# EAGLE board 150309_AriloRX_REV3_0_0 (EAGLE 6.5.0), part 1 of 2
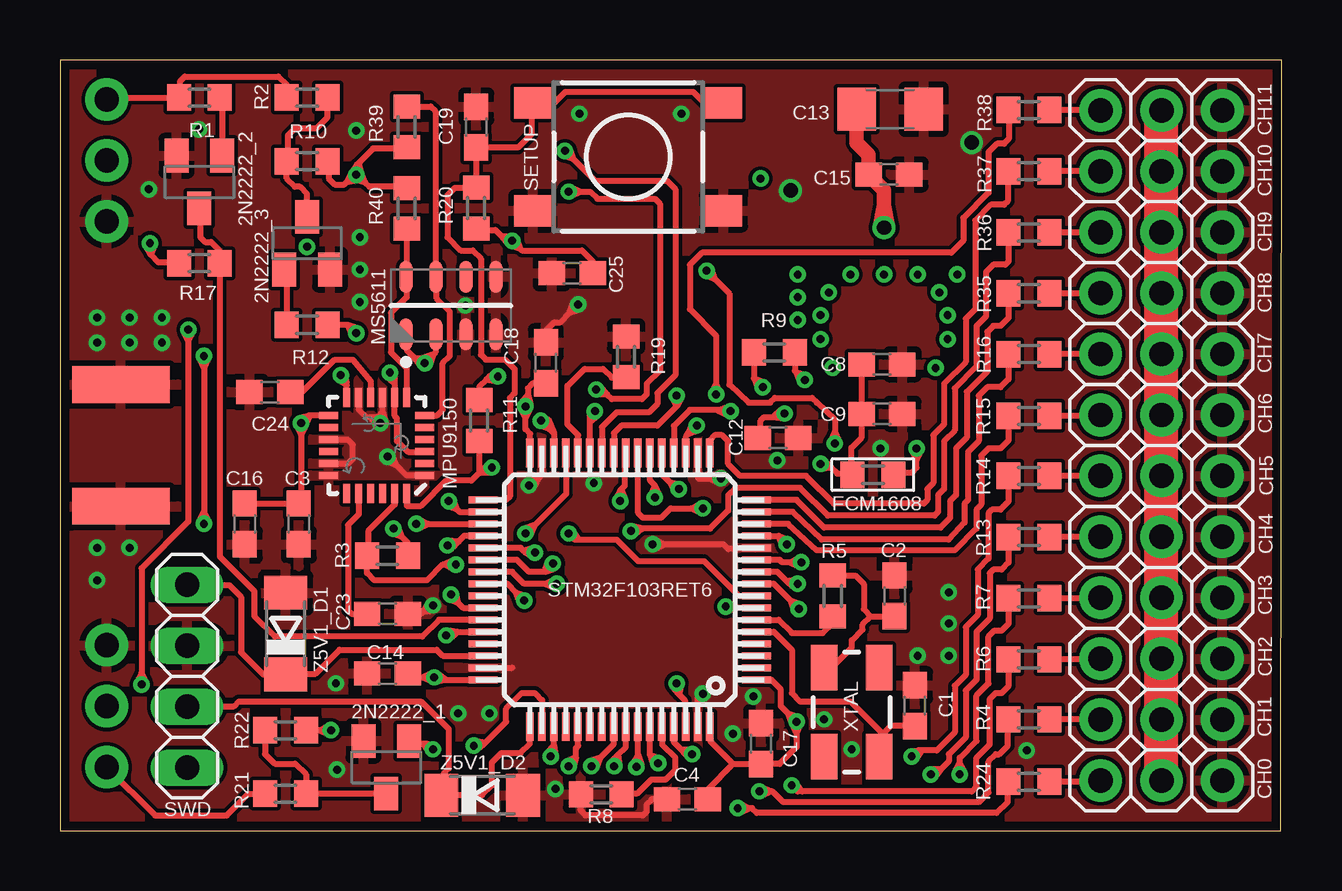
[diagram p0: board, top side]
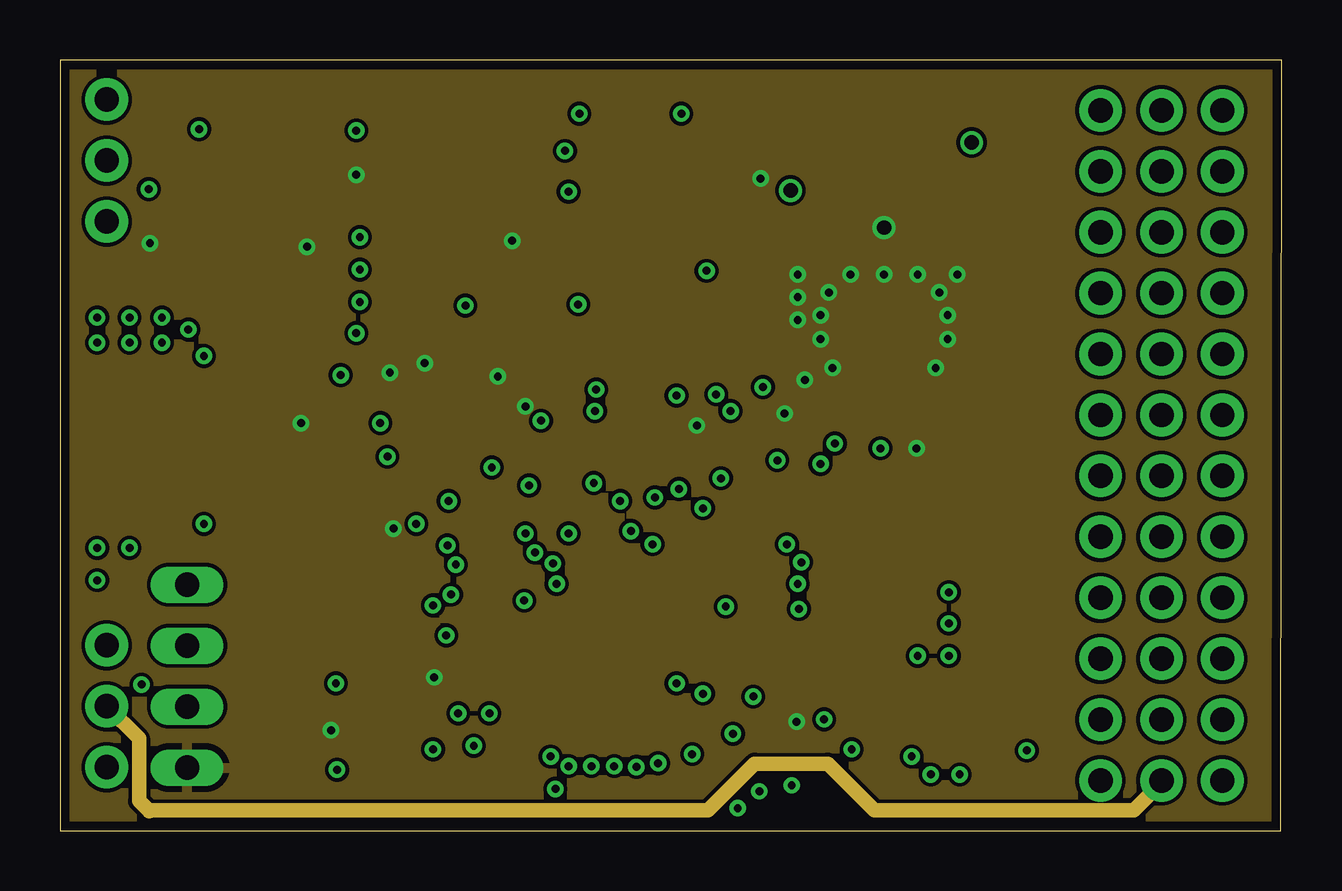
[diagram p1: board, inner layer Route2]
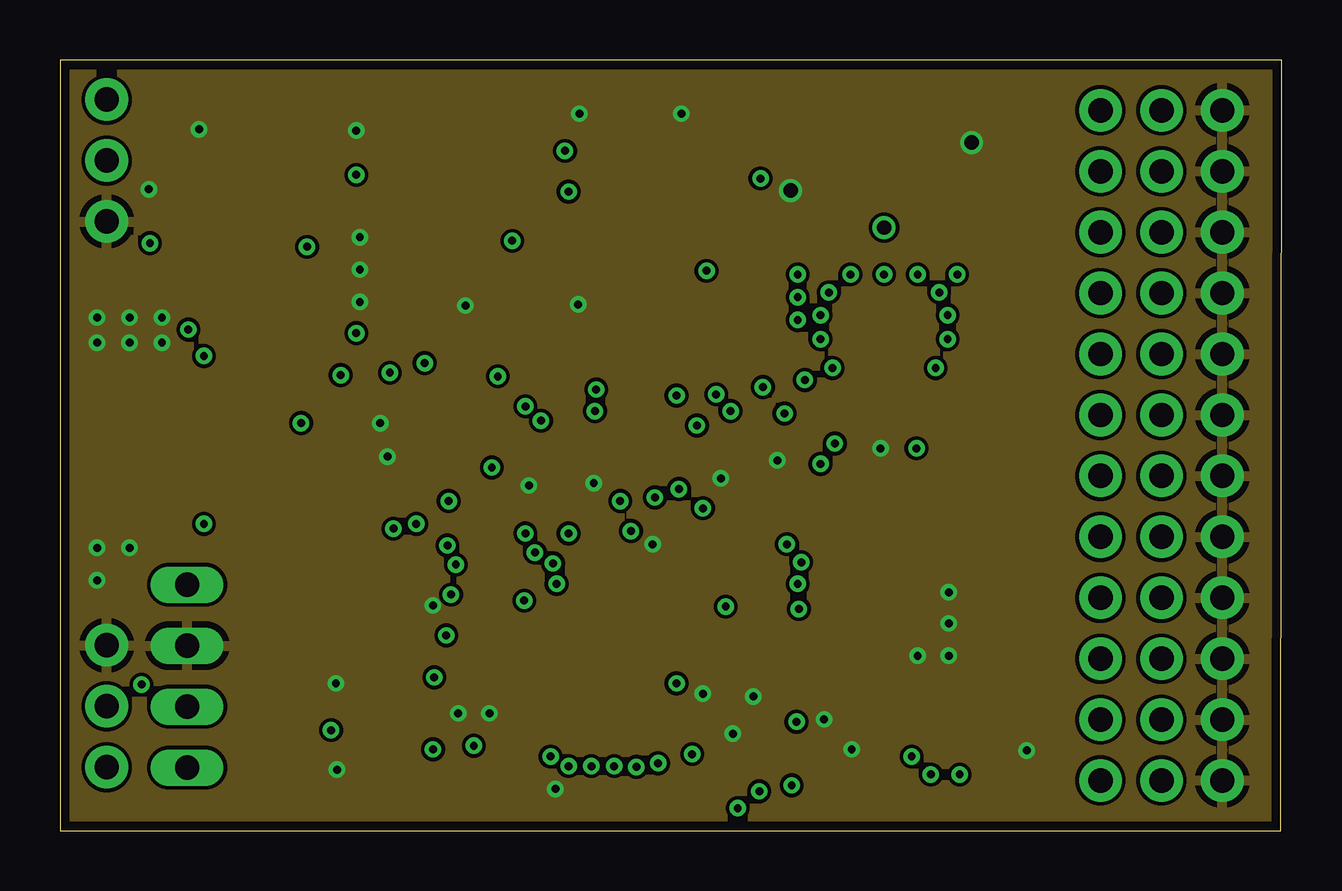
[diagram p2: board, inner layer Route15]
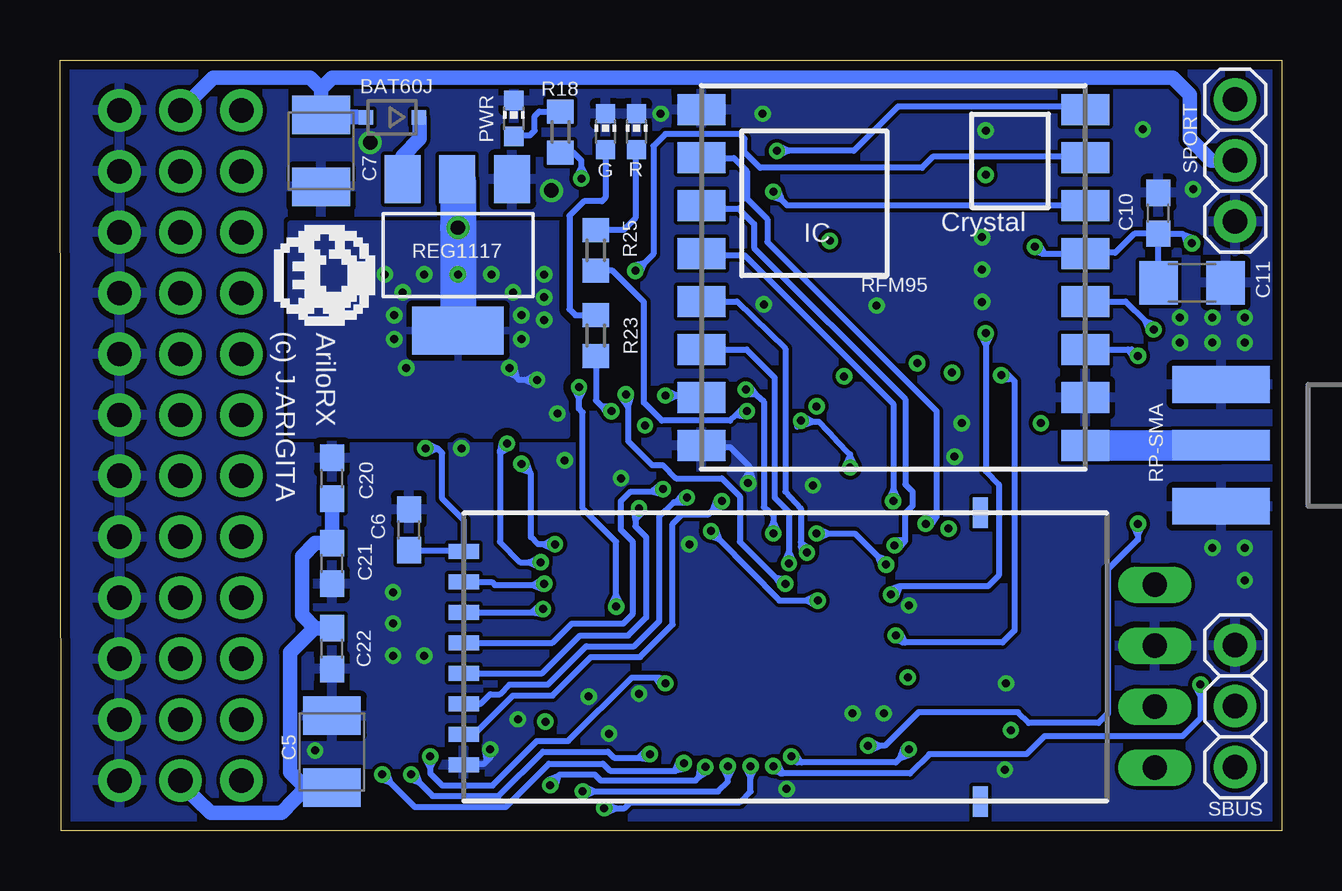
[diagram p3: board, bottom side, seen from below]

Size 50.94 x 32.14 mm. Coordinates in mm from the lower left corner, seen from the top.
Outline: 0,0 50.88,0 50.94,32.14 0,32.14 0,0
Copper layers (1*2*15*16): Top 0.0356mm / dielectric 0.17018125mm / Route2 0.0178mm / dielectric 47mil / Route15 0.0178mm / dielectric 0.17018125mm / Bottom 0.0356mm
Design rules "LaenPCBOrder *": minimum track width 6mil, minimum drill 13mil, track to track 6mil, track to pad 6mil, pad to pad 6mil, via to via 6mil, smd to smd 6mil, copper to edge 15mil, drill to drill 6mil, minimum pad ring 7mil, minimum via ring 7mil, stop-mask expansion 4mil, vias tented up to drill 0mil, thermal gap 10mil

## Footprints (pad centres in the part's own frame; a part is rotated, then mirrored left to right if it is on the bottom)
SOT23-BEC = smd 1 x 1.4: B -0.95,-1.1; C 0,1.1; E 0.95,-1.1
SOD323-R = smd 0.6 x 0.6: A 1.1,0; C -1.1,0
RESISTOR_C0603 = smd 1.1 x 1: 1 -0.85,0; 2 0.85,0
SMC_B = smd 1.6 x 2.4: + -1.5,0; - 1.5,0
RESISTOR_C3216 = smd 1.6 x 1.8: 1 -1.4,0; 2 1.4,0
1X03 = drill 1.016 pad 1.778: 1 -2.54,0; 2 0,0; 3 2.54,0
R0603 = smd 1 x 1.1: 1 -0.85,0; 2 0.85,0
CHIP-LED0603 = smd 0.8 x 0.8: A 0,-0.75; C 0,0.75
QFN-24-NP = smd 0.8 x 0.3: 1 -2,1.25; 2 -2,0.75; 3 -2,0.25; 4 -2,-0.25; 5 -2,-0.75; 6 -2,-1.25; 13 2,-1.25; 14 2,-0.75; 15 2,-0.25; 16 2,0.25; 17 2,0.75; 18 2,1.25 | smd 0.3 x 0.8: 7 -1.25,-2; 8 -0.75,-2; 9 -0.25,-2; 10 0.25,-2; 11 0.75,-2; 12 1.25,-2; 19 1.25,2; 20 0.75,2; 21 0.25,2; 22 -0.25,2; 23 -0.75,2; 24 -1.25,2
SON125P300X500X100-8N = smd 1.35 x 0.55: 1 -1.2,1.875; 2 -1.2,0.625; 3 -1.2,-0.625; 4 -1.2,-1.875; 5 1.2,-1.875; 6 1.2,-0.625; 7 1.2,0.625; 8 1.2,1.875
NRF24L01+_NRF24L01_SMD = smd 1.27 x 0.635: P$1 26.807,10.492; P$2 26.807,9.222; P$3 26.807,7.952; P$4 26.807,6.682; P$5 26.807,5.412; P$6 26.807,4.142; P$7 26.807,2.872; P$8 26.807,1.602 | smd 0.635 x 1.27: P$11 5.267,-0.018; P$13 5.267,12.032
LED_CHIP-LED0603 = smd 0.8 x 0.8: A 0,-0.75; C 0,0.75
RCL_R0603 = smd 1 x 1.1: 1 -0.85,0; 2 0.85,0
SOT223 = smd 1.499 x 2.007: 1 -2.261,-3.15; 2 0.025,-3.15; 3 2.311,-3.15 | smd 3.81 x 2.007: 4 0,3.15
RFM95W_MISIEK_RFM95W_SMD = smd 2 x 1.3: 1 -8,7; 2 -8,5; 3 -8,3; 4 -8,1; 5 -8,-1; 6 -8,-3; 7 -8,-5; 8 -8,-7; 9 8,-7; 10 8,-5; 11 8,-3; 12 8,-1; 13 8,1; 14 8,3; 15 8,5; 16 8,7
SMA_EDGELAUNCH = smd 4.064 x 1.524: GND@1 2.032,-2.54; GND@2 2.032,2.54 | smd 4.064 x 1.524 bottom: GND@3 2.032,2.54; GND@4 2.032,-2.54 | smd 4.064 x 1.27: P 2.032,0
DTSM-6 = smd 1.55 x 1.3: 1 -3.975,2.25; 2 3.975,2.25; 3 -3.975,-2.25; 4 3.975,-2.25
TQFP64 = smd 1.2 x 0.3: 1 -5.7,3.75; 2 -5.7,3.25; 3 -5.7,2.75; 4 -5.7,2.25; 5 -5.7,1.75; 6 -5.7,1.25; 7 -5.7,0.75; 8 -5.7,0.25; 9 -5.7,-0.25; 10 -5.7,-0.75; 11 -5.7,-1.25; 12 -5.7,-1.75; 13 -5.7,-2.25; 14 -5.7,-2.75; 15 -5.7,-3.25; 16 -5.7,-3.75; 33 5.7,-3.75; 34 5.7,-3.25; 35 5.7,-2.75; 36 5.7,-2.25; 37 5.7,-1.75; 38 5.7,-1.25; 39 5.7,-0.75; 40 5.7,-0.25; 41 5.7,0.25; 42 5.7,0.75; 43 5.7,1.25; 44 5.7,1.75; 45 5.7,2.25; 46 5.7,2.75; 47 5.7,3.25; 48 5.7,3.75 | smd 0.3 x 1.2: 17 -3.75,-5.7; 18 -3.25,-5.7; 19 -2.75,-5.7; 20 -2.25,-5.7; 21 -1.75,-5.7; 22 -1.25,-5.7; 23 -0.75,-5.7; 24 -0.25,-5.7; 25 0.25,-5.7; 26 0.75,-5.7; 27 1.25,-5.7; 28 1.75,-5.7; 29 2.25,-5.7; 30 2.75,-5.7; 31 3.25,-5.7; 32 3.75,-5.7; 49 3.75,5.7; 50 3.25,5.7; 51 2.75,5.7; 52 2.25,5.7; 53 1.75,5.7; 54 1.25,5.7; 55 0.75,5.7; 56 0.25,5.7; 57 -0.25,5.7; 58 -0.75,5.7; 59 -1.25,5.7; 60 -1.75,5.7; 61 -2.25,5.7; 62 -2.75,5.7; 63 -3.25,5.7; 64 -3.75,5.7
1X04 = drill 1.016 long: 1 -3.81,0; 2 -1.27,0; 3 1.27,0; 4 3.81,0
CRYSTAL-SMD-5X3 = smd 1.9 x 1.1: 1 -1.85,-1.15; 2 1.85,-1.15; 3 1.85,1.15; 4 -1.85,1.15
SOD80C = smd 1.4 x 1.8: A 1.7,0; C -1.7,0

## Placement (x,y rotation side)
2N2222_1  [SOT23-BEC]  13.6,2.65 180 top
2N2222_2  [SOT23-BEC]  5.81,27.05 180 top
2N2222_3  [SOT23-BEC]  10.3,24.5 0 top
BAT60J  [SOD323-R]  37.09,29.75 180 bottom
C1  12pF  [RESISTOR_C0603]  35.64,5.22 90 top
C2  12pF  [RESISTOR_C0603]  34.79,9.8 90 top
C3  100nF  [RESISTOR_C0603]  9.95,12.8 270 top
C4  100nF  [RESISTOR_C0603]  26.15,1.32 0 top
C5  [SMC_B]  39.6,3.3 90 bottom
C6  100nF  [RESISTOR_C0603]  36.38,12.55 90 bottom
C7  100uF  [SMC_B]  40.05,28.35 270 bottom
C8  100nF  [RESISTOR_C0603]  34.26,19.45 0 top
C9  1uF  [RESISTOR_C0603]  34.26,17.39 0 top
C10  100nF  [RESISTOR_C0603]  5.15,25.75 90 bottom
C11  10uF  [RESISTOR_C3216]  3.75,22.85 0 bottom
C12  100nF  [RESISTOR_C0603]  29.93,16.39 0 top
C13  10uF  [RESISTOR_C3216]  34.6,30.09 0 top
C14  100nF  [RESISTOR_C0603]  13.65,6.56 180 top
C15  100nF  [RESISTOR_C0603]  34.55,27.36 0 top
C16  10nF  [RESISTOR_C0603]  7.7,12.8 270 top
C17  100nF  [RESISTOR_C0603]  29.23,3.64 90 top
C18  100nF  [RESISTOR_C0603]  20.25,19.52 90 top
C19  100nF  [RESISTOR_C0603]  17.35,29.34 270 top
C20  100nF  [RESISTOR_C0603]  39.6,14.7 90 bottom
C21  10nF  [RESISTOR_C0603]  39.6,11.15 270 bottom
C22  1nF  [RESISTOR_C0603]  39.6,7.6 270 bottom
C23  2.2nF  [RESISTOR_C0603]  13.65,9.05 0 top
C24  100nF  [RESISTOR_C0603]  8.75,18.3 180 top
C25  100nF  [RESISTOR_C0603]  21.35,23.25 180 top
CH0  [1X03]  45.91,2.1 180 top
CH1  [1X03]  45.91,4.64 180 top
CH2  [1X03]  45.91,7.18 180 top
CH3  [1X03]  45.91,9.72 180 top
CH4  [1X03]  45.91,12.26 180 top
CH5  [1X03]  45.91,14.8 180 top
CH6  [1X03]  45.91,17.34 180 top
CH7  [1X03]  45.91,19.88 180 top
CH8  [1X03]  45.91,22.42 180 top
CH9  [1X03]  45.91,24.96 180 top
CH10  [1X03]  45.91,27.5 180 top
CH11  [1X03]  45.91,30.04 180 top
FCM1608  [R0603]  33.88,14.85 180 top
G  [CHIP-LED0603]  28.2,29.15 0 bottom
MPU9150  [QFN-24-NP]  13.2,16.07 180 top
MS5611  MS5611-01BA03  [SON125P300X500X100-8N]  16.3,21.9 90 top
NRF24L01_SMD  NRF24L01+_NRF24L01_SMDSMD  [NRF24L01+_NRF24L01_SMD]  7.3,13.25 180 bottom
PWR  [LED_CHIP-LED0603]  32.02,29.7 0 bottom
R  [CHIP-LED0603]  26.9,29.15 0 bottom
R1  10K  [RCL_R0603]  5.81,30.57 0 top
R2  1K  [RCL_R0603]  10.3,30.57 0 top
R3  4.7K  [RCL_R0603]  13.65,11.47 180 top
R4  1K  [RCL_R0603]  40.38,4.65 180 top
R5  80R  [RCL_R0603]  32.21,9.8 90 top
R6  1K  [RCL_R0603]  40.38,7.15 180 top
R7  1K  [RCL_R0603]  40.38,9.7 180 top
R8  510R  [RCL_R0603]  22.56,1.52 180 top
R9  10K  [RCL_R0603]  29.77,19.95 180 top
R10  1K  [RCL_R0603]  10.3,27.91 180 top
R11  4.7K  [RCL_R0603]  17.48,17.11 90 top
R12  1K  [RCL_R0603]  10.3,21.1 0 top
R13  1K  [RCL_R0603]  40.38,12.25 180 top
R14  1K  [RCL_R0603]  40.38,14.8 180 top
R15  1K  [RCL_R0603]  40.38,17.3 180 top
R16  1K  [RCL_R0603]  40.38,19.88 180 top
R17  4.7K  [RCL_R0603]  5.81,23.66 0 top
R18  10K  [RCL_R0603]  30.07,29.14 90 bottom
R19  510R  [RCL_R0603]  23.6,19.77 90 top
R20  10K  [RCL_R0603]  17.35,25.96 270 top
R21  1K  [RCL_R0603]  9.4,1.55 0 top
R22  1K  [RCL_R0603]  9.4,4.2 180 top
R23  220  [RCL_R0603]  28.6,20.65 270 bottom
R24  1K  [RCL_R0603]  40.38,2.05 180 top
R25  220  [RCL_R0603]  28.6,24.2 270 bottom
R35  1K  [RCL_R0603]  40.38,22.41 180 top
R36  1K  [RCL_R0603]  40.38,24.95 180 top
R37  1K  [RCL_R0603]  40.38,27.5 180 top
R38  1K  [RCL_R0603]  40.38,30.05 180 top
R39  4.7K  [RCL_R0603]  14.45,29.35 90 top
R40  4.7K  [RCL_R0603]  14.45,25.95 90 top
REG1117  REG1117  [SOT223]  34.35,24.02 180 bottom
RFM95  RFM95W_MISIEK_RFM95WSMD  [RFM95W_MISIEK_RFM95W_SMD]  16.2,23.07 0 bottom
RP-SMA  [SMA_EDGELAUNCH]  0.5,16.07 180 bottom
SBUS  [1X03]  1.95,5.2 90 bottom
SETUP  DTSM-6  [DTSM-6]  23.68,28.1 180 top
SPORT  [1X03]  1.95,27.95 270 bottom
STM32F103RET6  STM32F103RET6  [TQFP64]  23.34,10.05 180 top
SWD  [1X04]  5.3,6.45 90 top
XTAL  12MHz  [CRYSTAL-SMD-5X3]  33,4.95 270 top
Z5V1_D1  Z5V1  [SOD80C]  9.41,8.22 90 top
Z5V1_D2  Z5V1  [SOD80C]  17.6,1.49 0 top

## Library data of the parts
2N2222_1-2N2222_3 = transistor
BAT60J Z5V1_D1 Z5V1_D2 = diode
C1-C4 C6 C8-C25 PWR R1-R25 R35-R40 RFM95 = AriloTX
C5 C7 = rcl
CH0 CH1-CH11 SBUS SPORT = pinhead_rc
FCM1608 = BaseApp
G R = led
MPU9150 = SparkFun-Sensors
MS5611 = Measurement-Specialties
NRF24L01_SMD = Arilo_TX140810_AriloTX_REV3_0_0_868MHZ_td
REG1117 = CEDT
RP-SMA = adafruit
SETUP = switch-tact
STM32F103RET6 = stm32
SWD = pinhead
XTAL = SparkFun-FreqCtrl

## Nets
BOOT1: R19.1 STM32F103RET6.28
CH0: R24.2 STM32F103RET6.56
CH1: R4.2 STM32F103RET6.57
CH2: R6.2 STM32F103RET6.58
CH3: R7.2 STM32F103RET6.59
CH4: R13.2 STM32F103RET6.61
CH5: R14.2 STM32F103RET6.62
CH6: R15.2 STM32F103RET6.14
CH7: R16.2 STM32F103RET6.15
CH8: R35.2 STM32F103RET6.16
CH9: R36.2 STM32F103RET6.40
CH10: R37.2 STM32F103RET6.17
CH11: R38.2 STM32F103RET6.39
GND: 2N2222_1.E 2N2222_2.E 2N2222_3.E C1.2 C2.2 C3.2 C4.1 C5.- C6.2 C7.- C8.2 C9.2 C10.2 C11.2 C12.2 C13.2 C14.2 C15.2 C16.2 C17.2 C18.2 C19.1 C20.2 C21.2 C22.2 C23.2 C24.2 C25.2 CH0.1 CH1.1 CH2.1 CH3.1 CH4.1 CH5.1 CH6.1 CH7.1 CH8.1 CH9.1 CH10.1 CH11.1 G.C MPU9150.1 MPU9150.9 MPU9150.11 MPU9150.15 MPU9150.17 MPU9150.18 MS5611.3 MS5611.4 MS5611.5 NRF24L01_SMD.P$1 PWR.C R8.2 R19.2 R.C REG1117.1 RFM95.1 RFM95.8 RFM95.10 RP-SMA.GND@1 RP-SMA.GND@2 RP-SMA.GND@3 RP-SMA.GND@4 SBUS.3 SETUP.1 SETUP.2 SPORT.3 STM32F103RET6.12 STM32F103RET6.18 STM32F103RET6.31 STM32F103RET6.47 STM32F103RET6.63 SWD.3 Z5V1_D1.A Z5V1_D2.A
HOPERF_CSN: RFM95.5 STM32F103RET6.37
HOPERF_DIO0: RFM95.14 STM32F103RET6.8
HOPERF_DIO1: RFM95.15 STM32F103RET6.11
HOPERF_DIO2: RFM95.16 STM32F103RET6.26
HOPERF_DIO3: RFM95.11 STM32F103RET6.50
HOPERF_DIO4: RFM95.12 STM32F103RET6.53
HOPERF_DIO5: RFM95.7 STM32F103RET6.25
HOPERF_RESET: RFM95.6 STM32F103RET6.38
I2C2_SCL: MPU9150.23 R3.2 STM32F103RET6.29
I2C2_SDA: MPU9150.24 R11.1 STM32F103RET6.30
INP_1: C19.2 R20.1 SETUP.3 SETUP.4 STM32F103RET6.33
LED_GREEN: R23.2 STM32F103RET6.20
LED_RED: R25.2 STM32F103RET6.27
MPU_INT: MPU9150.12 STM32F103RET6.44
N$1: C1.1 STM32F103RET6.5 XTAL.3
N$2: R5.1 STM32F103RET6.6
N$3: C2.1 R5.2 XTAL.1
N$4: R8.1 STM32F103RET6.60
N$5: 2N2222_3.C R2.2 R10.2
N$7: RFM95.9 RP-SMA.P
N$8: 2N2222_3.B R12.1
N$9: CH0.3 R24.1
N$10: PWR.A R18.2
N$11: 2N2222_1.C R21.2 R22.2
N$12: G.A R23.1
N$13: CH8.3 R35.1
N$14: R1.1 R2.1 SPORT.1
N$15: R25.1 R.A
N$16: 2N2222_2.B R1.2
N$17: C8.1 C9.1 FCM1608.2 STM32F103RET6.13
N$19: STM32F103RET6.45
N$20: STM32F103RET6.2
N$21: CH2.3 R6.1
N$22: STM32F103RET6.3
N$23: CH4.3 R13.1
N$24: STM32F103RET6.4
N$25: CH9.3 R36.1
N$26: CH10.3 R37.1
N$27: CH11.3 R38.1
N$28: MPU9150.7 MS5611.8 R40.1
N$29: MPU9150.6 MS5611.7 R39.2
N$30: STM32F103RET6.55
N$31: CH3.3 R7.1
N$32: CH6.3 R15.1
N$33: C23.1 MPU9150.20
N$34: CH5.3 R14.1
N$35: CH7.3 R16.1
N$40: C24.1 MPU9150.10
N$53: CH1.3 R4.1
NRF_CE: NRF24L01_SMD.P$7 STM32F103RET6.10
NRF_CSN: NRF24L01_SMD.P$6 STM32F103RET6.9
NRF_IRQ: NRF24L01_SMD.P$2 STM32F103RET6.24
NSRST: R9.2 STM32F103RET6.7
SBUS: R21.1 SBUS.1
SPI1_MISO: NRF24L01_SMD.P$3 STM32F103RET6.22
SPI1_MOSI: NRF24L01_SMD.P$4 STM32F103RET6.23
SPI1_SCK: NRF24L01_SMD.P$5 STM32F103RET6.21
SPI2_MISO: RFM95.2 STM32F103RET6.35
SPI2_MOSI: RFM95.3 STM32F103RET6.36
SPI2_SCK: RFM95.4 STM32F103RET6.34
SWCLK: STM32F103RET6.49 SWD.2 Z5V1_D2.C
SWDIO: STM32F103RET6.46 SWD.4 Z5V1_D1.C
USART1_CK: STM32F103RET6.41
USART1_RX: 2N2222_2.C R17.2 STM32F103RET6.43
USART1_TX: R12.2 STM32F103RET6.42
USART3_RX: STM32F103RET6.52
USART3_TX: 2N2222_1.B STM32F103RET6.51
V+: BAT60J.A C5.+ C7.+ C20.1 C21.1 C22.1 CH0.2 CH1.2 CH2.2 CH3.2 CH4.2 CH5.2 CH6.2 CH7.2 CH8.2 CH9.2 CH10.2 CH11.2 SBUS.2 SPORT.2
VCC: C3.1 C4.2 C6.1 C10.1 C11.1 C12.1 C13.1 C14.1 C15.1 C16.1 C17.1 C18.1 C25.1 FCM1608.1 MPU9150.3 MPU9150.8 MPU9150.13 MS5611.1 MS5611.2 NRF24L01_SMD.P$8 R3.1 R9.1 R10.1 R11.2 R17.1 R18.1 R20.2 R22.1 R39.1 R40.2 REG1117.2 REG1117.4 RFM95.13 STM32F103RET6.1 STM32F103RET6.19 STM32F103RET6.32 STM32F103RET6.48 STM32F103RET6.64 SWD.1
VDD: BAT60J.C REG1117.3